# Altium PCB JKD-907-V3-NB26-TMR.PcbDoc
Units mm, origin at the board's own origin, x right, y up, seen from the top; angles counter-clockwise.
Board outline 43 x 44.77 mm, 2 copper layers (Top Layer, Bottom Layer); 2 components, 48 nets, 14 pads, 0 vias.
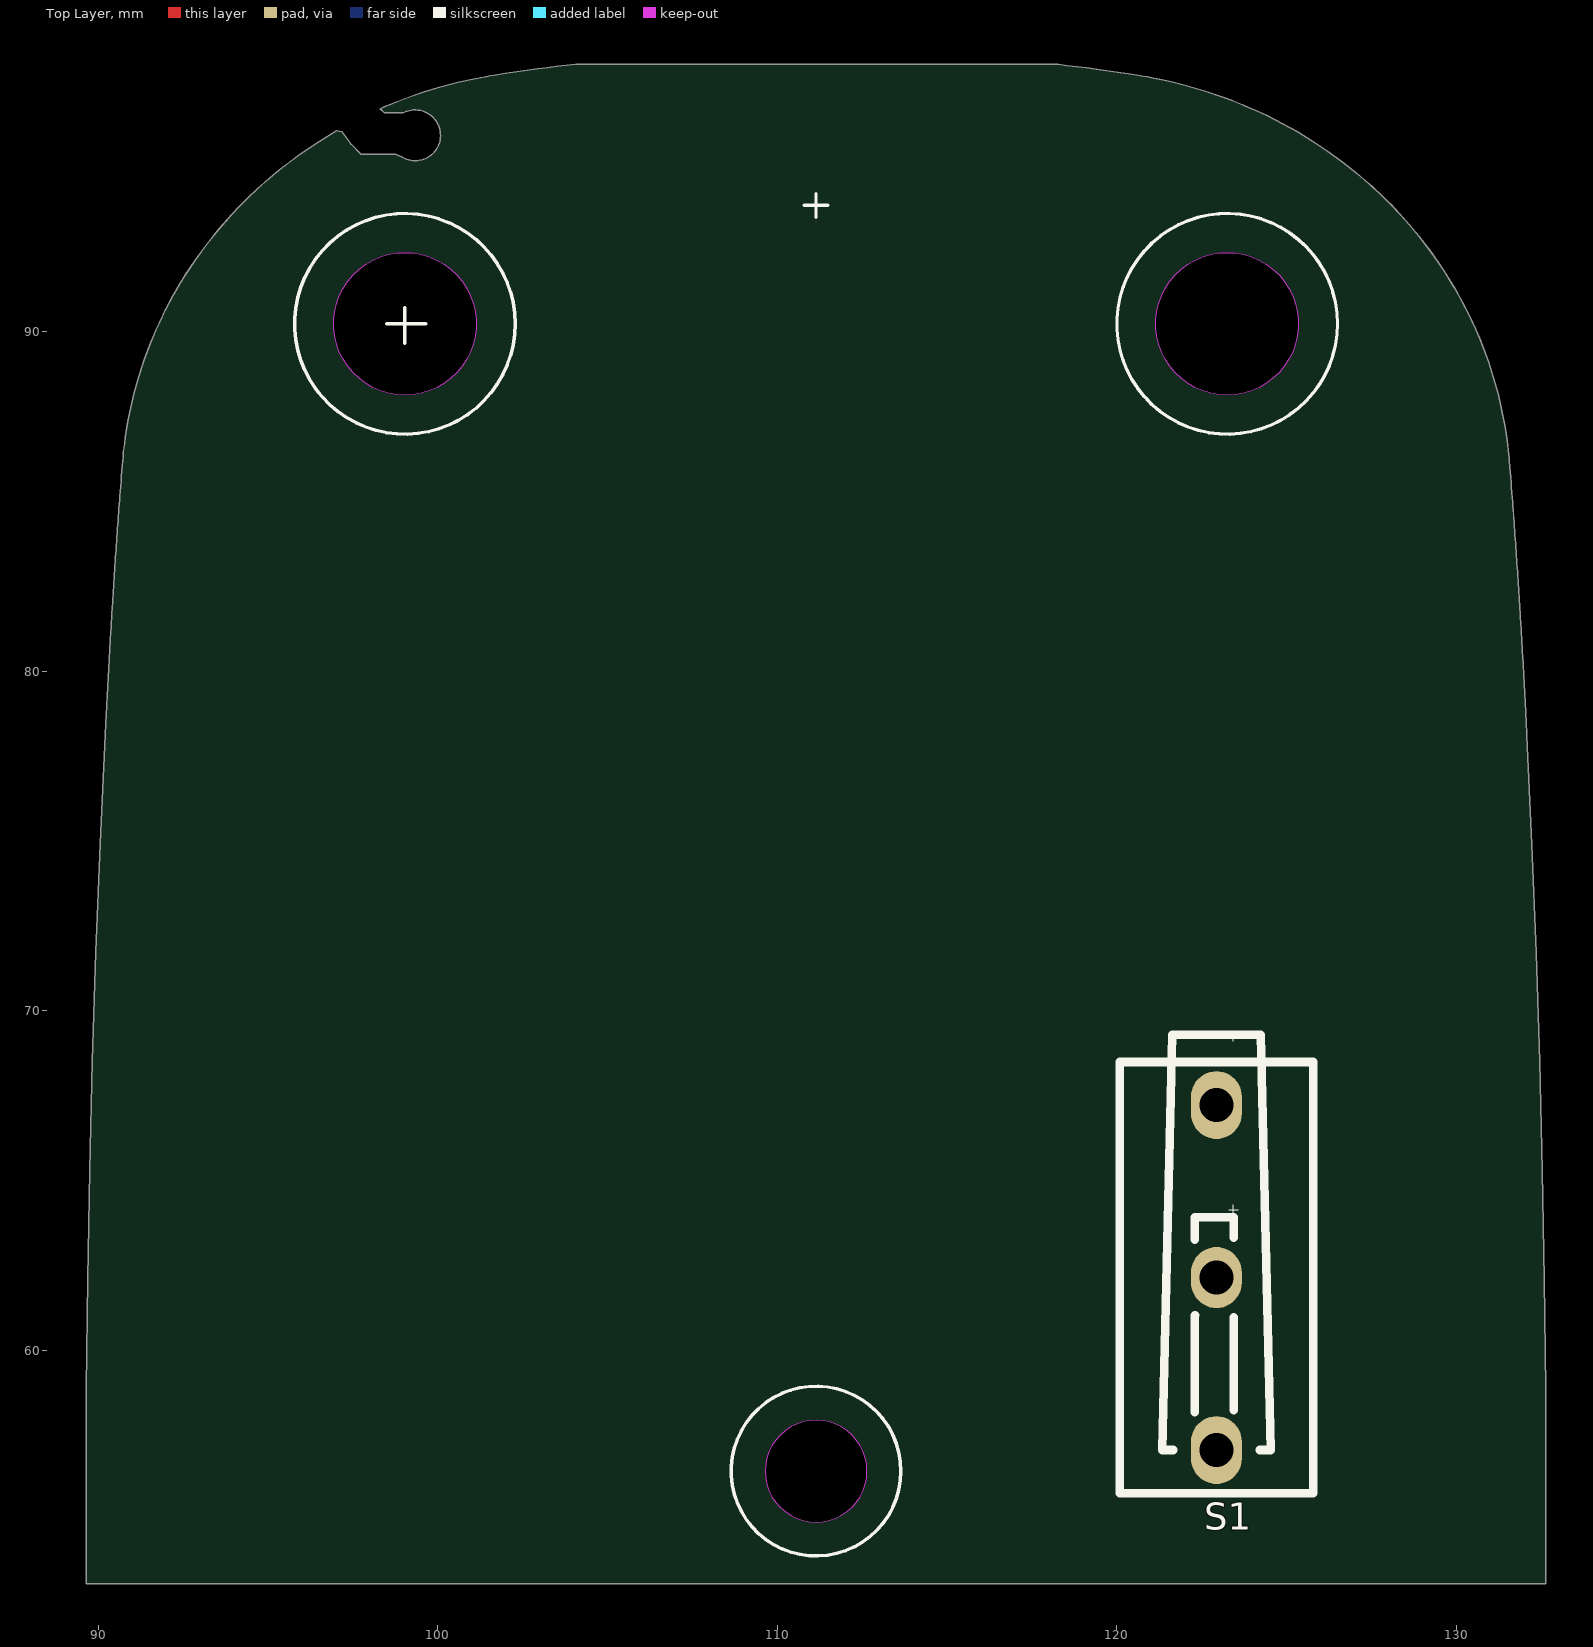
[diagram p0: Top Layer view]
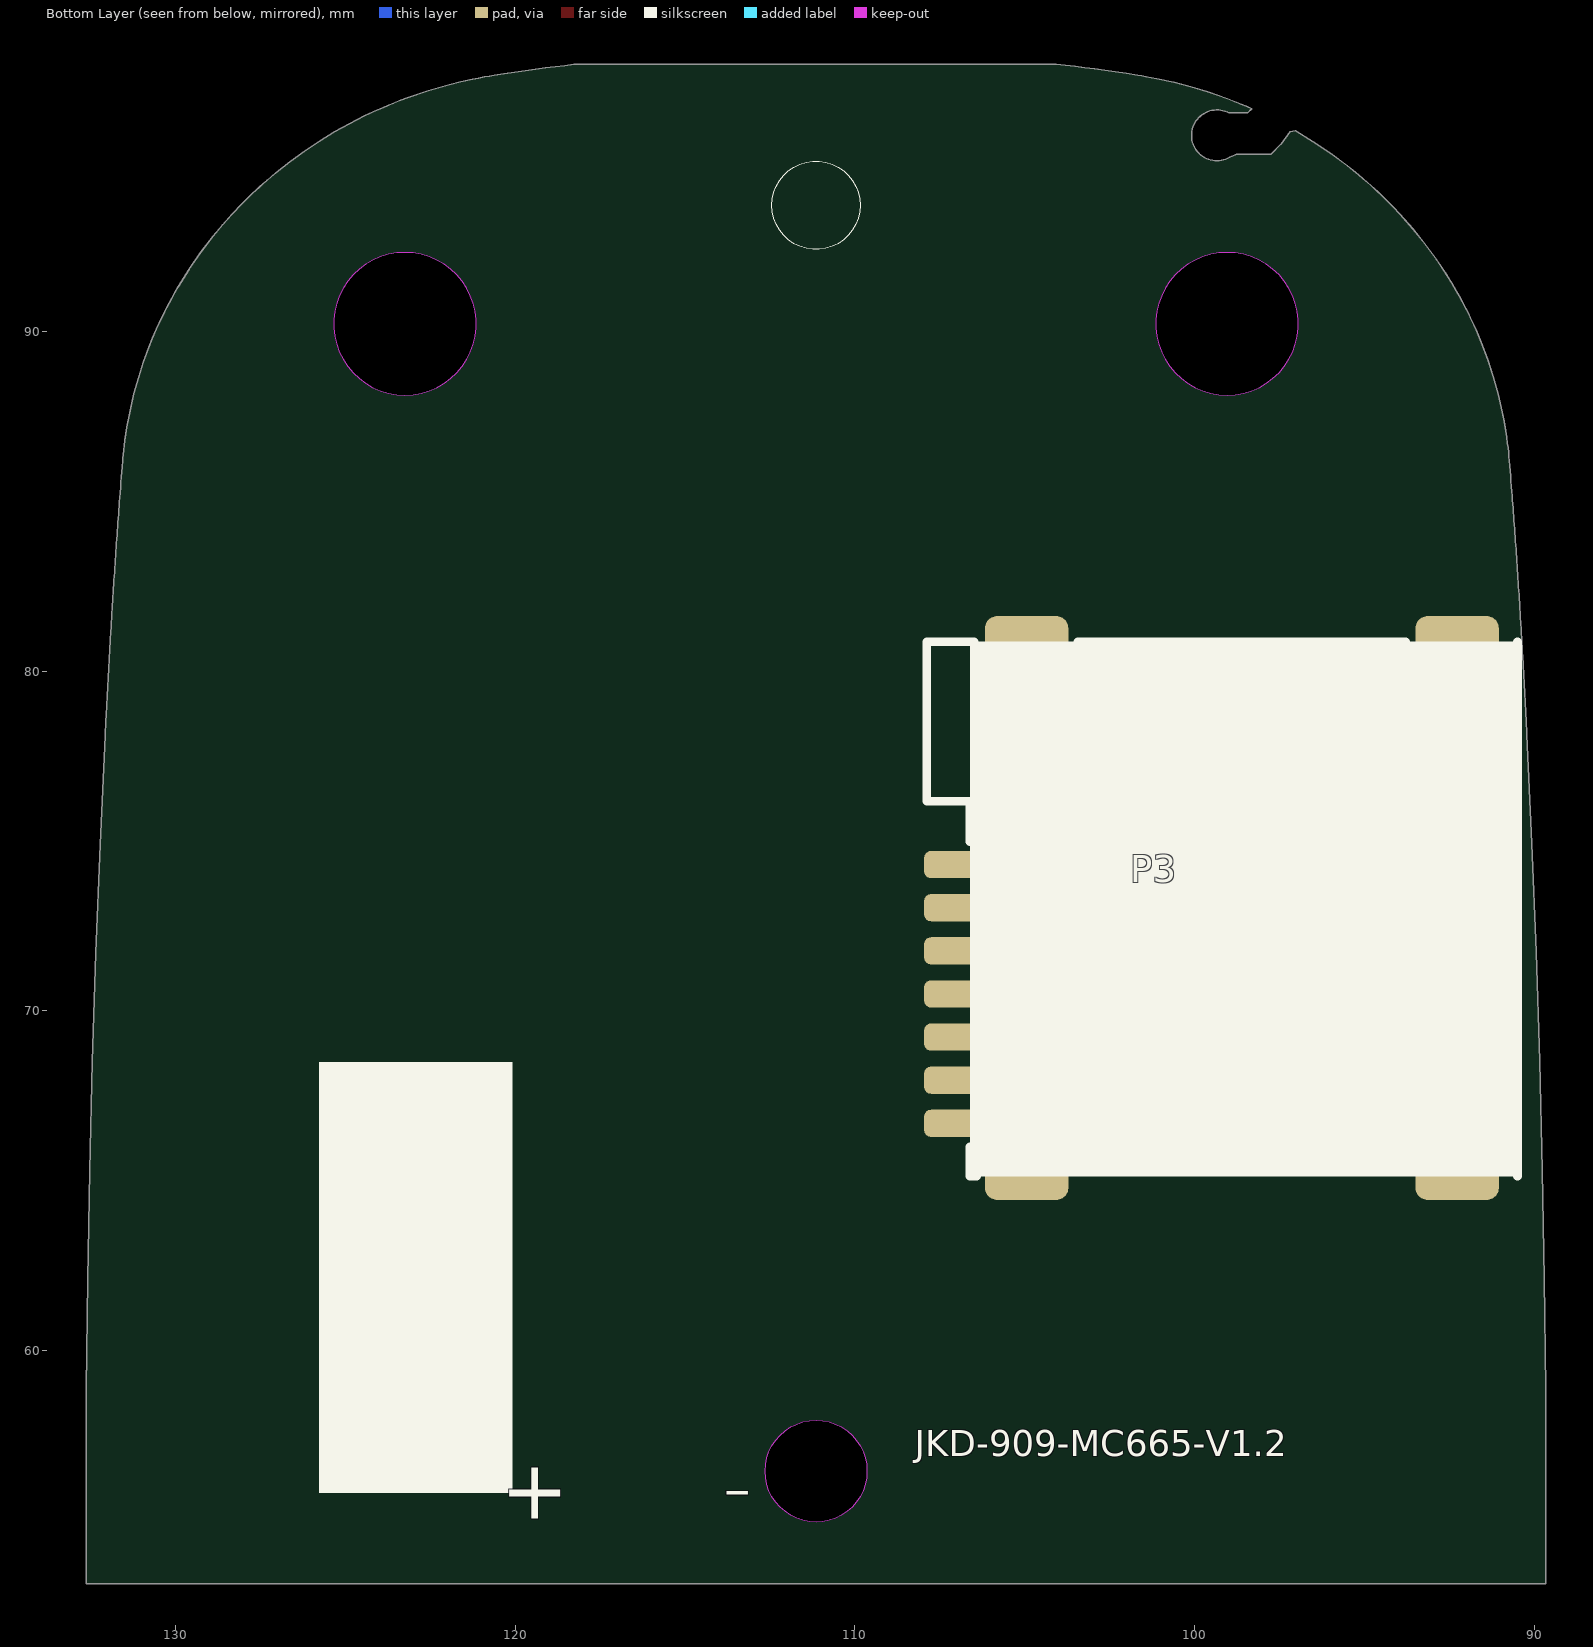
[diagram p1: Bottom Layer view, seen from below]

## Layer stack, top to bottom
Top Solder: solder mask 0.0102, Solder Resist, Dk 3.5
Top Layer: signal copper 0.0356
Dielectric 1: dielectric 0.32, FR-4, Dk 4.8
Bottom Layer: signal copper 0.0356
Bottom Solder: solder mask 0.0102, Solder Resist, Dk 3.5

## Board outline
89.655,53.111 89.648,55.661 cw(c537.48,55.661) 90.212,78.128 90.215,78.189 90.218,78.25 90.221,78.311 90.224,78.372 90.227,78.433 90.23,78.494 90.233,78.555 90.236,78.616 90.24,78.677 90.243,78.738 90.246,78.799 90.251,78.891 90.255,78.982 90.26,79.074 90.265,79.165 90.27,79.257 90.275,79.348 90.28,79.44 90.285,79.531 90.289,79.623 90.294,79.714 90.299,79.806 90.304,79.897 90.309,79.989 90.315,80.08 90.32,80.172 90.325,80.263 90.33,80.355 90.335,80.446 90.34,80.538 90.345,80.629 90.351,80.721 90.356,80.812 90.361,80.904 90.367,80.995 90.372,81.086 90.377,81.178 90.383,81.269 90.388,81.361 90.394,81.452 90.399,81.543 90.405,81.635 90.41,81.726 90.416,81.818 90.422,81.909 90.427,82 90.435,82.122 90.443,82.244 90.45,82.366 90.458,82.488 90.466,82.609 90.474,82.731 90.482,82.853 90.49,82.974 90.498,83.096 90.506,83.218 90.514,83.34 90.523,83.461 90.531,83.583 90.539,83.704 90.548,83.826 90.556,83.948 90.565,84.069 90.574,84.191 90.582,84.312 90.591,84.434 90.6,84.555 90.609,84.677 90.618,84.798 90.627,84.92 90.636,85.041 90.646,85.163 90.655,85.284 90.667,85.436 90.679,85.587 90.691,85.739 90.703,85.891 90.715,86.042 90.728,86.194 cw(c102.334,85.238) 90.75,86.437 cw(c102.463,85.224) 90.782,86.713 cw(c102.582,85.209) 90.833,87.067 cw(c102.706,85.189) 90.934,87.625 cw(c102.773,85.177) 91.554,89.68 cw(c102.607,85.24) 91.872,90.401 cw(c102.809,85.144) 91.984,90.629 cw(c102.923,85.086) 92.118,90.886 cw(c103.02,85.034) 92.292,91.199 cw(c103.143,84.964) 92.559,91.641 cw(c103.235,84.907) 93.946,93.454 cw(c103.093,85.032) 94.35,93.873 cw(c103.221,84.904) 94.515,94.033 cw(c103.322,84.799) 94.696,94.202 cw(c103.424,84.688) 94.907,94.391 cw(c103.508,84.592) 95.162,94.61 cw(c103.6,84.482) 95.508,94.888 cw(c103.691,84.364) 97.026,95.909 97.178,95.887 97.448,95.522 97.754,95.216 98.76,95.216 98.963,95.126 ccw(c99.338,95.776) 98.983,96.437 98.437,96.437 98.313,96.561 cw(c103.721,84.256) 98.632,96.696 cw(c103.774,84.128) 99.018,96.847 cw(c103.829,83.98) 99.616,97.056 cw(c103.853,83.911) 101.11,97.446 cw(c103.807,84.129) 101.433,97.508 cw(c103.781,84.275) 101.674,97.548 102.012,97.601 102.332,97.648 102.643,97.692 102.944,97.733 103.236,97.772 103.519,97.807 103.802,97.841 104.075,97.872 104.15,97.877 118.173,97.877 118.277,97.865 118.55,97.834 118.833,97.8 119.116,97.764 119.408,97.726 119.709,97.685 120.02,97.64 120.339,97.592 120.621,97.548 cw(c118.515,84.279) 120.911,97.499 cw(c118.482,84.096) 121.266,97.43 cw(c118.452,83.951) 121.948,97.269 cw(c118.444,83.916) 123.181,96.883 cw(c118.508,84.094) 123.583,96.729 cw(c118.553,84.207) 123.903,96.596 cw(c118.624,84.37) 124.189,96.468 cw(c118.664,84.455) 124.441,96.349 cw(c118.7,84.534) 125.323,95.878 cw(c118.602,84.361) 127.051,94.678 cw(c118.763,84.564) 127.322,94.449 cw(c118.873,84.69) 127.547,94.25 cw(c118.954,84.778) 127.742,94.069 cw(c119.047,84.876) 127.907,93.91 128.057,93.76 cw(c119.156,84.988) 128.899,92.815 cw(c119.056,84.904) 129.934,91.318 cw(c119.233,85.011) 130.128,90.976 cw(c119.345,85.072) 130.272,90.705 cw(c119.452,85.127) 130.394,90.462 cw(c119.58,85.189) 130.495,90.249 130.579,90.065 cw(c119.68,85.236) 130.802,89.525 cw(c119.557,85.189) 131.1,88.654 cw(c119.517,85.175) 131.445,87.175 cw(c119.693,85.206) 131.503,86.789 cw(c119.797,85.22) 131.538,86.498 cw(c119.96,85.238) 131.562,86.255 131.568,86.194 131.582,86.012 131.595,85.86 131.607,85.709 131.619,85.557 131.631,85.405 131.643,85.254 131.654,85.102 131.663,84.981 131.673,84.859 131.682,84.738 131.691,84.616 131.7,84.495 131.708,84.373 131.717,84.252 131.726,84.13 131.735,84.008 131.743,83.887 131.752,83.765 131.76,83.644 131.769,83.522 131.777,83.4 131.785,83.279 131.793,83.157 131.801,83.035 131.81,82.914 131.817,82.792 131.825,82.67 131.833,82.548 131.841,82.427 131.849,82.305 131.857,82.183 131.864,82.061 131.872,81.939 131.879,81.818 131.885,81.726 131.89,81.635 131.896,81.543 131.902,81.452 131.907,81.361 131.912,81.269 131.918,81.178 131.923,81.086 131.929,80.995 131.934,80.904 131.939,80.812 131.945,80.721 131.95,80.629 131.955,80.538 131.96,80.446 131.965,80.355 131.971,80.263 131.976,80.172 131.981,80.08 131.986,79.989 131.991,79.897 131.996,79.806 132.001,79.714 132.006,79.623 132.011,79.531 132.016,79.44 132.021,79.348 132.025,79.257 132.03,79.165 132.035,79.074 132.04,78.982 132.045,78.891 132.049,78.799 132.054,78.708 132.057,78.647 132.06,78.586 132.064,78.525 132.067,78.464 132.07,78.403 132.073,78.342 132.076,78.281 132.079,78.219 132.082,78.158 132.085,78.097 cw(c-315.182,55.661) 132.648,55.661 132.64,53.111
cut-out: 109.648,56.435 ccw(c111.148,56.435) 111.148,54.935 ccw(c111.148,56.435) 112.648,56.435 ccw(c111.148,56.435) 111.148,57.935 ccw(c111.148,56.435)
cut-out: 123.257,88.126 cw(c123.257,90.226) 123.257,92.326 cw(c123.257,90.226)
cut-out: 99.038,88.126 cw(c99.038,90.226) 99.038,92.326 cw(c99.038,90.226)

## Design rules (kind name [scope] priority, off if disabled: settings)
Clearance 1 [InNet('GND') vs InNet('NetC1_2')- InNet('NetC2_2')] p1: gap=0.4 ignorepadtopadclearanceinfootprint=TRUE
Clearance [All] p2: gap=0.14 ignorepadtopadclearanceinfootprint=FALSE
MinimumSolderMaskSliver [All] p1: minsoldermaskwidth=0
NetAntennae [All] p1: netantennaetolerance=0.01
PlaneConnect [All] p1: planeconnectstyle=Direct reliefexpansion=0.508 reliefentries=4 reliefconductorwidth=0.254 reliefairgap=0.254
PolygonConnect [All] p1: connectstyle=Direct reliefconductorwidth=0.254 reliefentries=4 polygonreliefangle="90 Angle" airgapwidth=0.254
RoutingVias [All] p1: holewidth=0.711 width=1.27 viastyle="Through Hole" minholewidth=0.35 minwidth=0.7 maxholewidth=0.711 maxwidth=1.27
SilkToSilkClearance [All] p1: silktosilkclearance=0
SilkToSolderMaskClearance [IsPad] p1: minsilkscreentomaskgap=0 clearancetoexposedcopper=TRUE
SolderMaskExpansion [All] p1: expansion=0.102 istentingtop=FALSE
UnRoutedNet [All] p1: checkbadconnections=TRUE
Width [All] p1: maxlimit=10 minlimit=0.254 preferedwidth=0.254
24 further rules are at their usual default settings.

## Components (designator, comment, footprint, x,y, rotation, side; value= is the part's Value field where it differs from the comment)
P3 "7pin-卡槽" SIM_card 99.337,72.759 r0 bottom locked
S1 "SW-SPDT" SW-TH_DEALON_LF-118 122.943,62.135 r90 top locked

## Footprints (in the part's own frame and the unit in brackets; to place one, negate y for a bottom-side part, rotate by r counter-clockwise, add the part's x,y. Pads: shape width x height; smd on the part's side, far side on the other; paste and mask are expansions set on the pad)
SIM_card [mm]
  rrect50% 2x0.8 smd: 1(7.627,4.811) 2(7.627,2.271) 3(7.627,-0.269) 5(7.627,6.081) 6(7.627,3.541) 7(7.627,1.001) ""(7.627,-1.539)
  rrect50% 2.45x1.4 smd: ""(-7.073,-8.159) ""(-7.073,7.641) ""(5.607,-8.159) ""(5.607,7.641)
  silkscreen extent -8.85,-8.11 8.55,7.64, body extent -8.77,-8.64 8.44,7.86, height 1.44
SW-TH_DEALON_LF-118 [mm]
  oval 2x1.5 hole 1: C(-5.08,0) NC(5.08,0)
  oval 1.8x1.5 hole 1: NO(0,0)
  silkscreen extent -6.35,-2.85 7.15,2.85

## Part data
P3: library part "Header 8", LatestRevisionDate=17-Jul-2002, LatestRevisionNote="Re-released for DXP Platform.", Publisher="Altium Limited"
S1: "SPDT Subminiature Toggle Switch, Right Angle Mounting, Vertical Actuation", ComponentLink1Description="Manufacturer Link", ComponentLink1URL=http://www.apem.com, DatasheetVersion=05-Dec-2000, LatestRevisionDate=17-Dec-2003, LatestRevisionNote="Schematic revised, PCB Footprint replaced.", PackageDescription="Switch; 4 Leads", PackageReference=TL36WW15050, Published=24-Mar-1999, Publisher="Altium Limited"

## Nets (pads, with @x,y where several pads share a name; then routed paths per layer and width w, separated by ;. In a path a pad name is that pad's centre, name@x,y a point inside that pad or via, vN(x,y) a via of type N, cw(c..) or ccw(c..) an arc to the next point about the centre after c; other vN are vias at no path point)
3V3: 
BEEP: 
BOOT: 
button_1: 
door: 
door3V3: 
door_1: 
GND: 
LED_GREEN: 
LED_RED: 
NB26_RXD: 
NB26_TXD: 
NB_RESET: 
NetC1_2: 
NetC2_2: 
NetC3_2: 
NetC5_2: 
NetC6_2: 
NetC7_2: 
NetC9_2: 
NetC10_1: 
NetC13_1: 
NetC14_2: 
NetC15_1: 
NetC16_1: 
NetD1_A: 
NetD2_A: 
NetD5_1: 
NetD7_1: 
NetD10_1: 
NetD11_1: 
NetD12_1: 
NetD12_2: 
NetP4_1: 
NetQ1_1: 
NetQ4_1: 
NetQ6_1: 
NetQ7_1: 
NetQ100_1: 
NetR200_1: 
SIM_CLK: 
SIM_DATA: 
SIM_RST: 
SIM_VCC: 
tamper: 
tamper_1: 
VDD_EXT: 
wakeup: 
pads on no net: P3. P3.1 P3.2 P3.3 P3.5 P3.6 P3.7 S1.C S1.NC S1.NO

## Silkscreen, mask and mechanical layers (free items; w line width, h text height)
Top Overlay:
  circle w0.1: c111.148,56.435 r2.5
  circle w0.1: c99.038,90.226 r3.25
  circle w0.1: c123.257,90.226 r3.25
  lines w0.01: 123.3,64.132 123.442,64.132 ; 123.3,69.232 123.442,69.232 ; 123.442,63.989 123.442,64.132 ; 123.442,64.274 123.442,64.132 ; 123.442,69.089 123.442,69.232 ; 123.442,69.374 123.442,69.232 ; 123.585,64.132 123.442,64.132 ; 123.585,69.232 123.442,69.232
  lines w0.1: 98.507,90.226 99.038,90.226 ; 99.038,89.645 99.038,90.226 ; 99.038,90.701 99.038,90.226 ; 99.657,90.226 99.038,90.226 ; 110.802,93.715 111.148,93.715 ; 111.148,93.37 111.148,93.715 ; 111.148,94.061 111.148,93.715 ; 111.493,93.715 111.148,93.715
Bottom Overlay:
  circle w0.013: c111.148,93.715 r1.3
  rectangle: 120.093,55.785 125.793,68.485
  rectangle: 90.485,65.118 106.613,80.866
  text "JKD-909-MC665-V1.2" at 108.238,56.626 h1.3
  text "-" at 113.888,54.626 h3
  text "+" at 120.438,54.451 h3
Mechanical 1:
  drawing of 247 lines, arcs and shapes, not listed